# Altium PCB ECG_NEMO_final_V1B_main_stack2.PcbDoc
Units mm, origin at the board's own origin, x right, y up, seen from the top; angles counter-clockwise.
Board outline 54.01 x 36.22 mm, 4 copper layers (Top Layer, Signal Layer 1, Signal Layer 2, Bottom Layer), stack 0.778 mm thick; 61 components, 44 nets, 223 pads, 101 vias.
Unrouted connection lines stored in the file: 72.
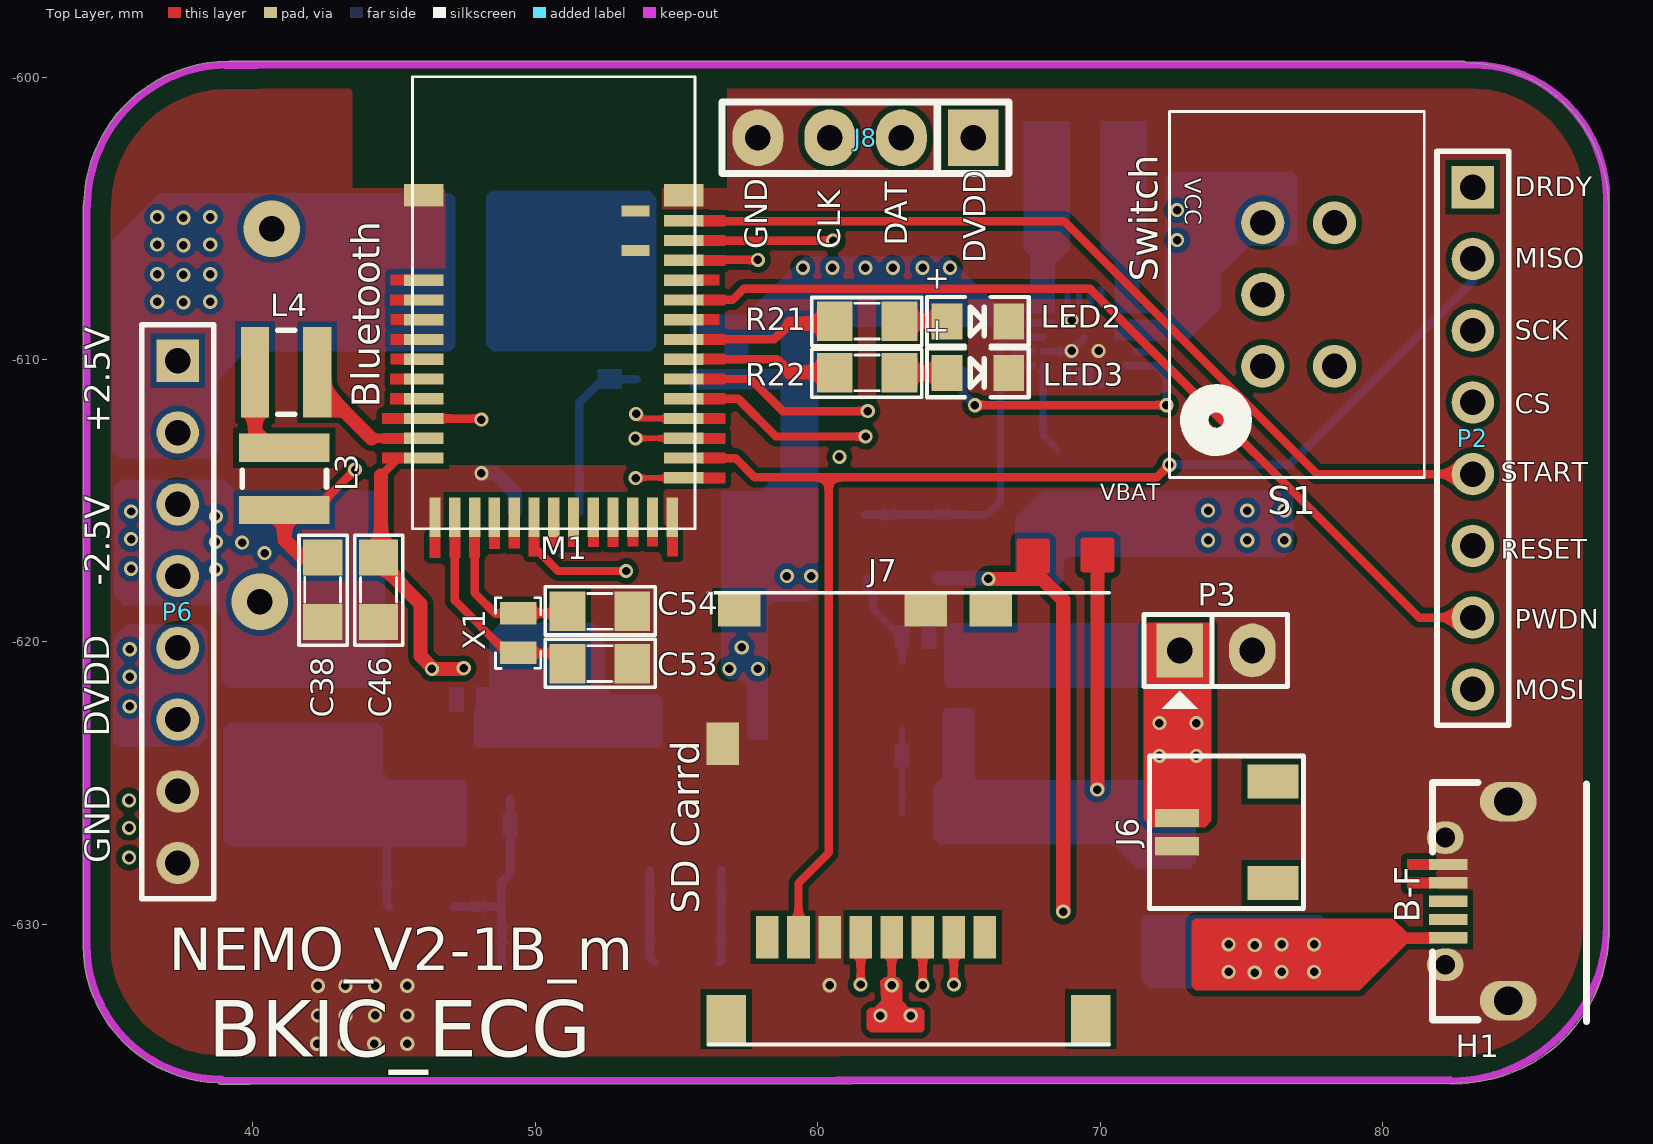
[diagram p0: Top Layer view]
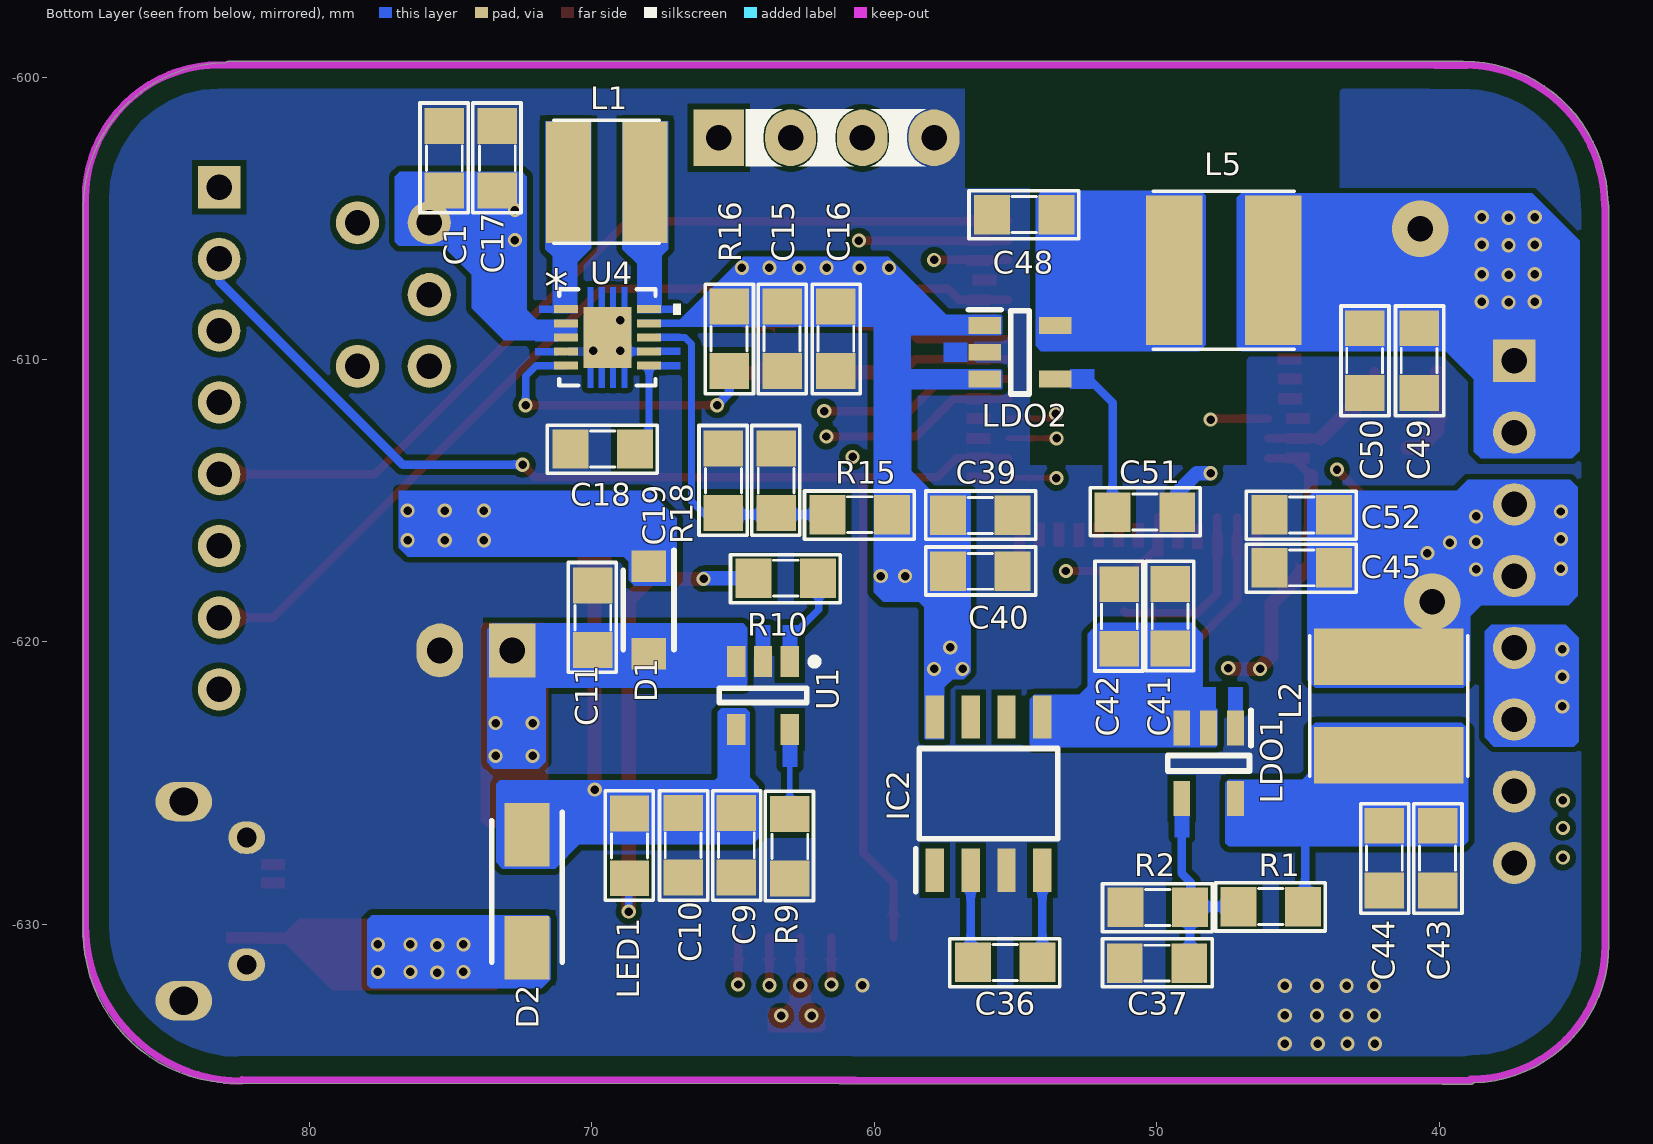
[diagram p1: Bottom Layer view, seen from below]
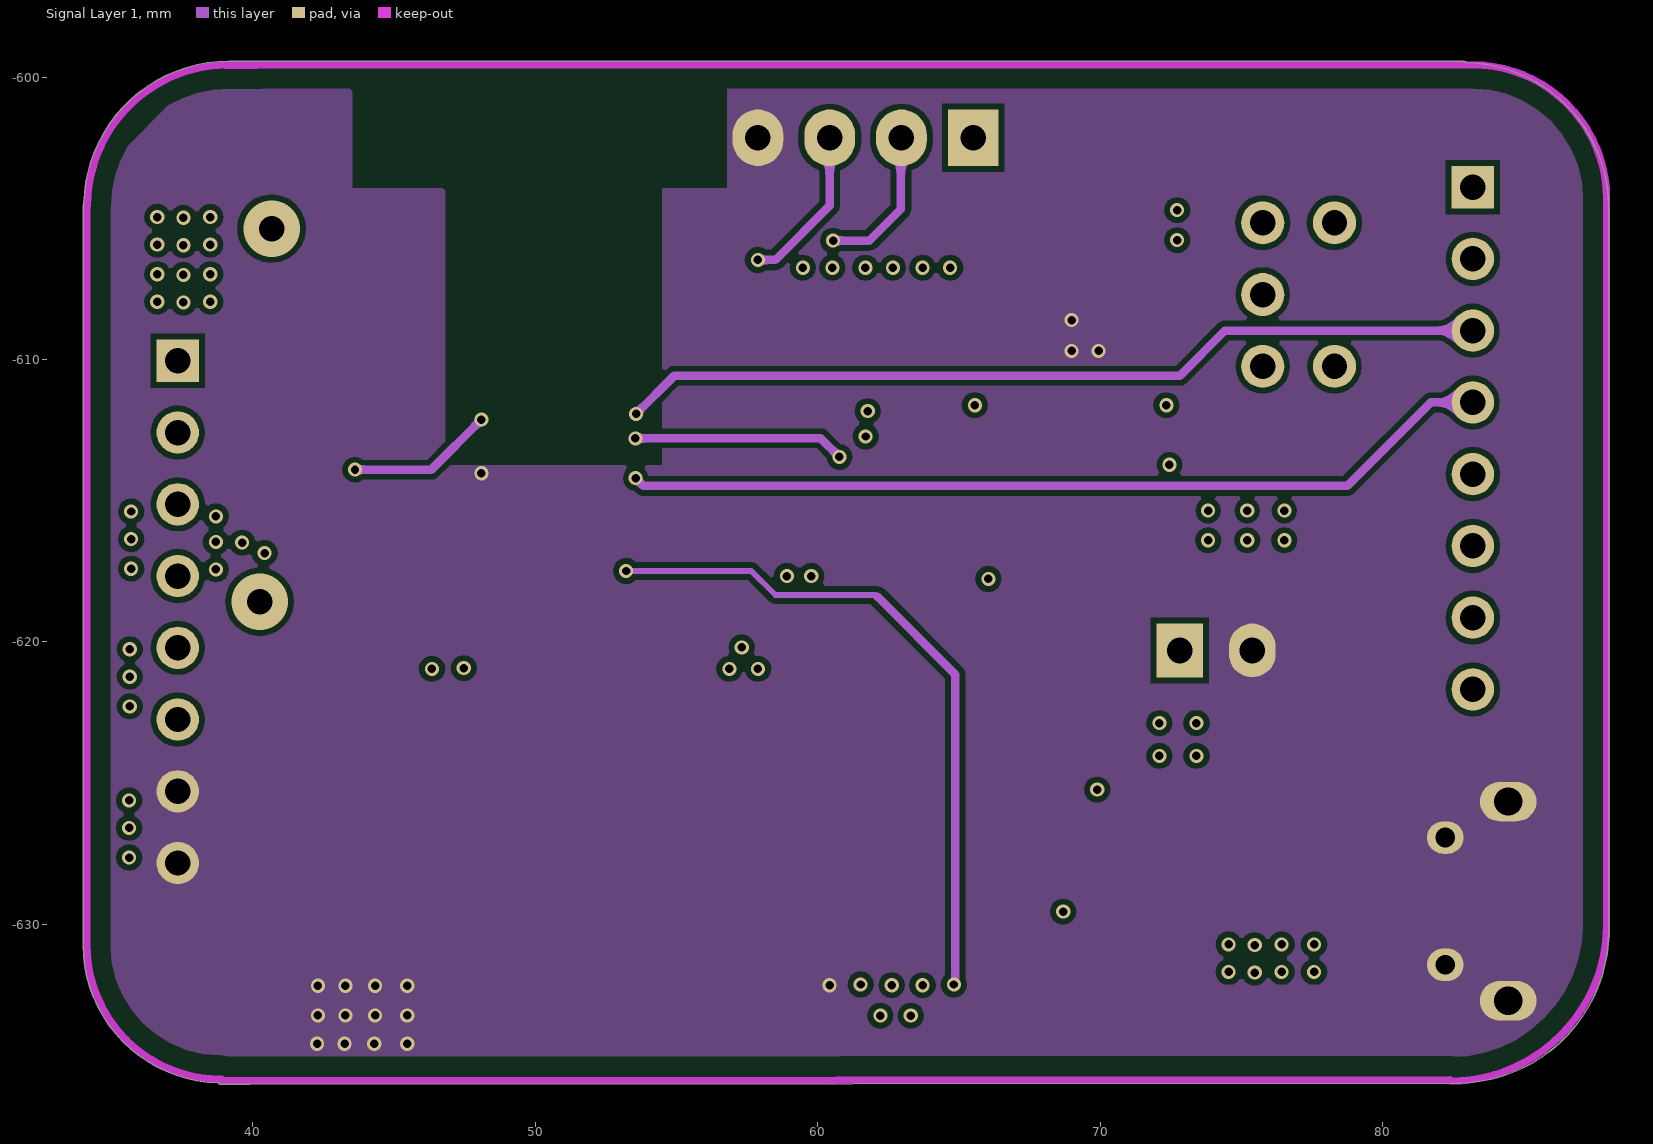
[diagram p2: Signal Layer 1]
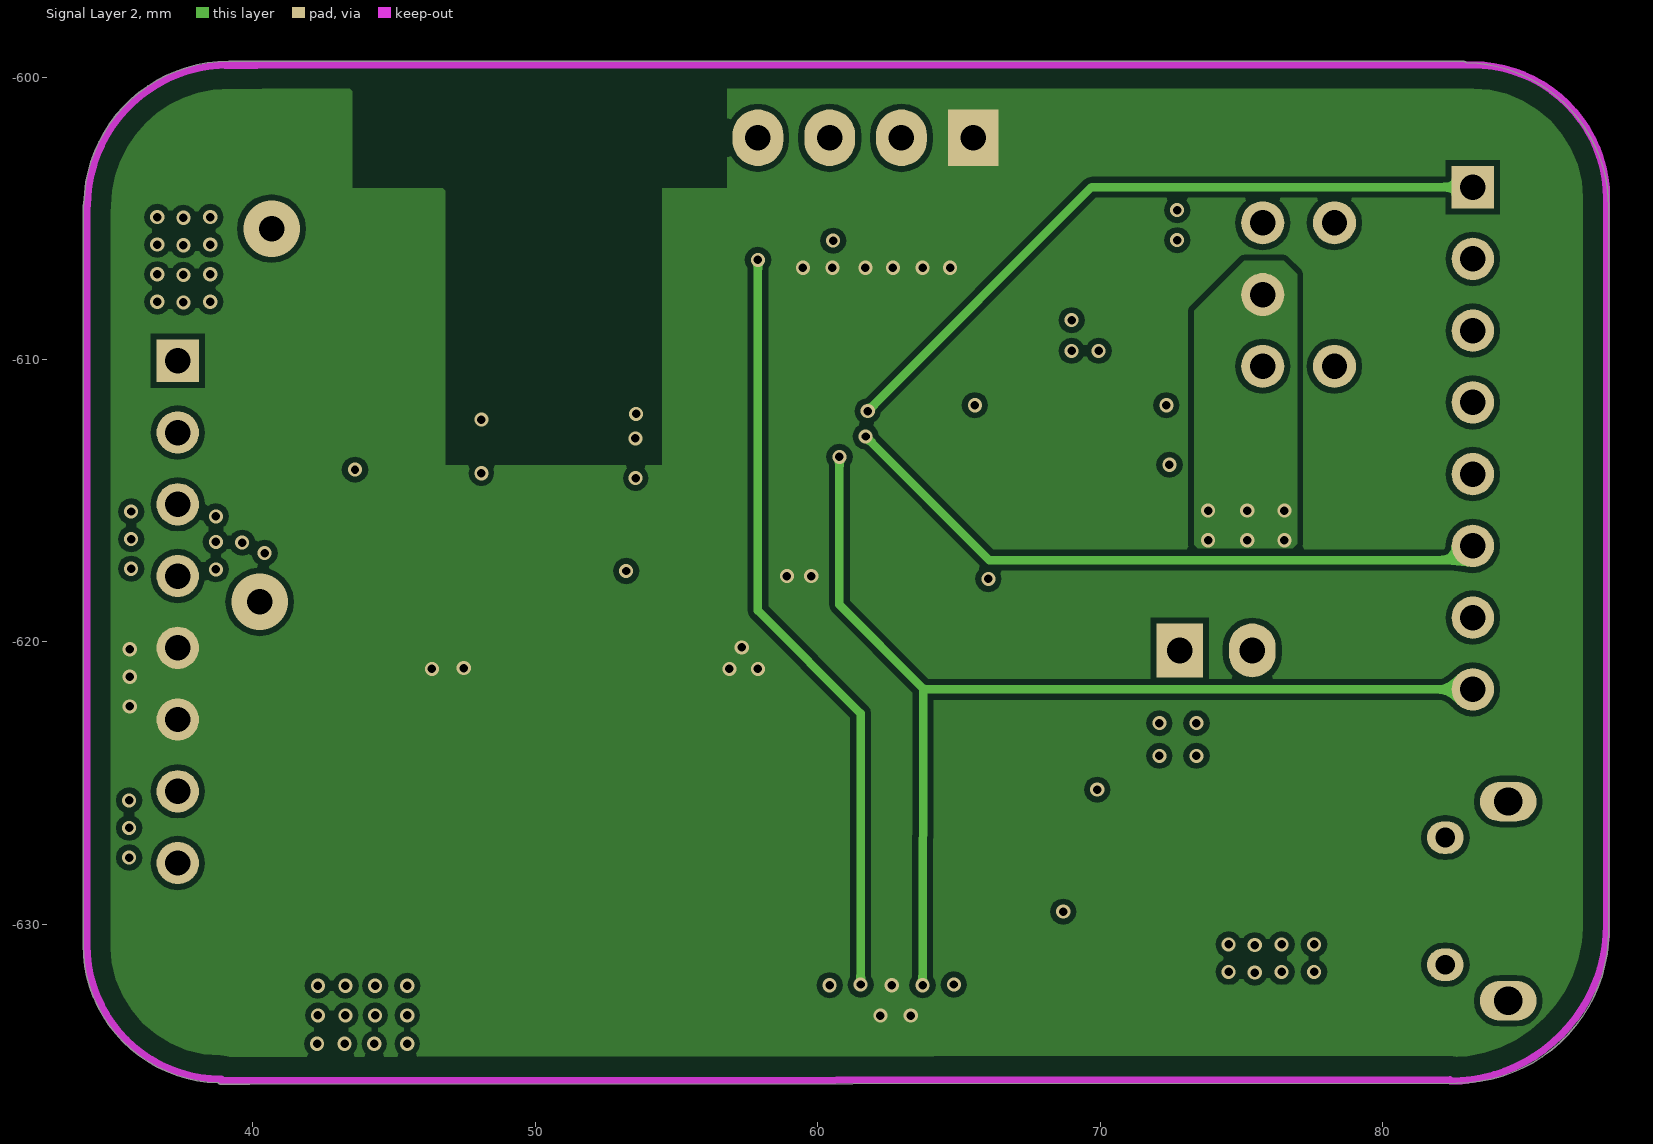
[diagram p3: Signal Layer 2]
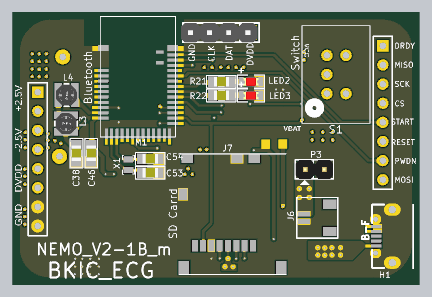
[diagram p4: 3D render of the assembled board from above, using the file's embedded part models]
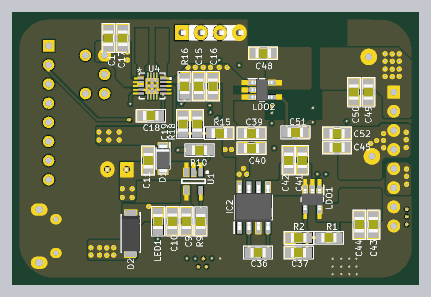
[diagram p5: 3D render of the assembled board from below, using the file's embedded part models]

## Layer stack, top to bottom
Top Solder: solder mask 0.0102, Solder Resist, Dk 3.5
Top Layer: signal copper 0.0356
Dielectric 1: core 0.254, FR-4, Dk 4.2
Signal Layer 1: signal copper 0.036
Dielectric 3: prepreg 0.127, Dk 4.2
Signal Layer 2: signal copper 0.036
Dielectric 2: core 0.254, Dk 4.2
Bottom Layer: signal copper 0.0356
Solder Side: solder mask 0.0102, Solder Resist, Dk 3.5

## Board outline
34.004,-630.721 ccw(c38.887,-630.721) 38.782,-635.603 ccw(c38.887,-635.531) 38.887,-635.659 ccw(c38.887,-635.531) 38.888,-635.659 39.869,-635.659 ccw(c39.869,-635.531) 39.884,-635.658 82.625,-635.621 ccw(c82.625,-635.494) 82.646,-635.62 ccw(c82.62,-630.23) 88.01,-630.23 88.01,-604.624 ccw(c82.882,-604.624) 82.982,-599.497 ccw(c82.882,-599.576) 82.882,-599.449 56.154,-599.441 cw(c56.152,-599.568) 56.154,-599.441 cw(c56.154,-599.568) 56.154,-599.441 ccw(c56.152,-599.568) 56.152,-599.441 39.181,-599.441 ccw(c39.181,-599.568) 39.171,-599.441 ccw(c39.157,-599.568) 39.157,-599.44 ccw(c39.157,-604.568) 34.03,-604.491 ccw(c34.131,-604.568) 34.004,-604.568 34.004,-630.721 ccw(c34.131,-630.721)

## Design rules (kind name [scope] priority, off if disabled: settings)
Clearance Clearance_5mils [TouchesRoom('Driver') and OnTopLayer] p1: gap=0.127 ignorepadtopadclearanceinfootprint=TRUE
Clearance Clearance_5.7mils [TouchesRoom('FETs')] p2: gap=0.145 ignorepadtopadclearanceinfootprint=FALSE
Clearance Clearance_keepout [OnLayer('Keep-Out Layer')] p3: gap=0.711 ignorepadtopadclearanceinfootprint=FALSE
Clearance [All] p4: gap=0.203 ignorepadtopadclearanceinfootprint=FALSE
ComponentClearance [All] p1: gap=0.3 collisioncheckmode=3 verticalgap=0.3 showdistances=TRUE
HoleSize [All] p1: absolutevalues=TRUE maxlimit=10 minlimit=0.025 maxpercent=80.000 minpercent=20.000
HoleToHoleClearance [All] p1: gap=0.241 allowstackedmicrovias=TRUE
MinimumSolderMaskSliver [All] p1 off: minsoldermaskwidth=0.254
PlaneConnect [All] p1: planeconnectstyle=Direct reliefexpansion=0.508 reliefentries=4 reliefconductorwidth=0.254 reliefairgap=0.254
PolygonConnect [All] p1: connectstyle=Direct reliefconductorwidth=0.254 reliefentries=4 polygonreliefangle="90 Angle" airgapwidth=0.254
RoutingVias [All] p1: holewidth=0.3 width=0.5 viastyle="Through Hole" minholewidth=0.178 minwidth=0.351 maxholewidth=0.508 maxwidth=0.762
SilkToSilkClearance [All] p1 off: silktosilkclearance=0.254
SilkToSolderMaskClearance [IsPad] p1 off: minsilkscreentomaskgap=0.254 clearancetoexposedcopper=TRUE
SolderMaskExpansion [All] p1: expansion=0.102 istentingtop=FALSE
UnRoutedNet [All] p1: checkbadconnections=TRUE
UnpouredPolygon [All] p1 off:
Width [All] p1: maxlimit=3 minlimit=0.2 preferedwidth=0.3
21 further rules are at their usual default settings.

## Components (designator, comment, footprint, x,y, rotation, side; value= is the part's Value field where it differs from the comment)
C1 "1uF" SM-0805 75.225,-602.875 r270 bottom value=103
C9 "47uF" SM-0805 64.889,-627.193 r90 bottom value=103
C10 "4uF/10V" SM-0805 66.771,-627.194 r90 bottom value=103
C11 "4uF/10V" SM-0805 69.971,-619.143 r270 bottom value=103
C15 "22uF" SM-0805 63.271,-609.261 r90 bottom value=103
C16 "22uF" SM-0805 61.367,-609.261 r90 bottom value=103
C17 "10uF" SM-0805 73.35,-602.875 r270 bottom value=103
C18 "0.1uF" SM-0805 69.621,-613.168 r180 bottom value=103
C19 "10pF" SM-0805 65.346,-614.293 r270 bottom value=103
C36 "1uF" SM-0805 55.371,-631.345 r180 bottom value=103
C37 "0.01uF" SM-0805 49.997,-631.37 r0 bottom value=103
C38 "1uF" SM-0805 42.482,-618.155 r90 top value=103
C39 "10uF" SM-0805 56.252,-615.518 r0 bottom value=103
C40 "1uF" SM-0805 56.252,-617.499 r0 bottom value=103
C41 "10uF" SM-0805 49.531,-619.093 r270 bottom value=103
C42 "2.2uF" SM-0805 51.33,-619.098 r270 bottom value=103
C43 "2.2uF" SM-0805 40.063,-627.65 r90 bottom value=103
C44 "1uF" SM-0805 41.95,-627.65 r90 bottom value=103
C45 "10uF" SM-0805 44.875,-617.375 r180 bottom value=103
C46 "10uF" SM-0805 44.457,-618.155 r90 top value=103
C48 "1uF" SM-0805 54.696,-604.868 r180 bottom value=103
C49 "10uF" SM-0805 40.716,-610.036 r90 bottom value=103
C50 "0.1uF" SM-0805 42.646,-610.036 r90 bottom value=103
C51 "1uF" SM-0805 50.425,-615.4 r0 bottom value=103
C52 "1uF" SM-0805 44.875,-615.5 r180 bottom value=103
C53 "12pF" SM-0805 52.296,-620.769 r180 top value=103
C54 "12pF" SM-0805 52.296,-618.914 r180 top value=103
D1 "SS34FA" SODFL3618X143N 67.996,-618.868 r270 bottom
D2 "N4007" DIOM5025X220N 72.296,-628.831 r270 bottom
H1 "USB B Micro/Mini" "USB-B-MICRO-female Tai02" 84.925,-629.475 r270 top
IC2 "LM2660MX_NOPB" SOIC127P600X175-8N 55.96,-625.368 r90 bottom
J6 "Jumper 2" "J2_Jst SH_1mm" 72.729,-627.233 r90 top value="JP 2"
J7 "502570-0893" MOLEX_502570-0893 63.225,-626.25 r180 top
J8 "Loading" SIP4 61.7,-602.15 r180 top value="Connector 4x2"
L1 "1.5uH, 1.75A" WE-TPC_381692 -1200.521,666.296 r180 bottom
L2 "3.3 uH, 1.95A" WE-TPC_4818/482892 1311.796,647.732 r90 bottom
L3 "10 uH, 1 A" WE-TPC_2828 41.125,-614.225 r0 top
L4 "15 uH, 0.72 A" WE-TPC_2828 41.189,-610.45 r270 top
L5 "3.3 uH, 1.95A" WE-TPC_4818/482892 -1222.364,663.157 r180 bottom
LDO1 "TPS72301DDCT" SOT95P280X110-5N 48.171,-624.293 r270 bottom
LDO2 "LDK130M25R" SOT95P280X145-5N 54.846,-609.743 r180 bottom
LED1 "LED" SM-0805 68.671,-627.219 r270 bottom value="LED 3 ly Single Colour"
LED2 "LED" led0805 65.675,-608.65 r0 top value="LED 3 ly Single Colour"
LED3 "LED" led0805 65.675,-610.471 r0 top value="LED 3 ly Single Colour"
M1 "MODULE_MDBT42Q" PCB_MDBT42Q_10X16 50.659,-599.99 r0 top
P2 "TOP Header 1" HDR1X8 83.196,-603.898 r270 top
P3 "Header 2" JP2 72.825,-620.298 r0 top
P6 "TOP Header 3" HDR1X8 37.35,-610.045 r270 top
R1 "100k" SM-0805 45.971,-629.368 r180 bottom value="R1/4W - 1K"
R2 "100k" SM-0805 49.971,-629.395 r180 bottom value="R1/4W - 1K"
R9 "2k" SM-0805 62.996,-627.236 r270 bottom value="R1/4W - 1K"
R10 "470" SM-0805 63.14,-617.743 r180 bottom value="R1/4W - 1K"
R15 "666k" SM-0805 60.521,-615.493 r180 bottom value="R1/4W - 1K"
R16 "1M" SM-0805 65.146,-609.261 r90 bottom value="R1/4W - 1K"
R18 "111k" SM-0805 63.478,-614.293 r270 bottom value="R1/4W - 1K"
R21 "1k" SM-0805 61.753,-608.642 r0 top value="R1/4W - 1K"
R22 "1k" SM-0805 61.753,-610.471 r0 top value="R1/4W - 1K"
S1 "Switch" SS12SDP2LC 75.76,-610.24 r90 top
U1 "MCP73832T-2ACI/OT" SOT-23-OT5_N 63.946,-621.893 r270 bottom
U4 "Part Number: TPS63060DSCR" DSC10_1P70X2P15 69.451,-609.218 r180 bottom value=Value
X1 "32.768kHz" "Crystal 32.768kHz SMD" 49.399,-618.885 r270 top value=4Mhz

## Footprints (in the part's own frame and the unit in brackets; to place one, negate y for a bottom-side part, rotate by r counter-clockwise, add the part's x,y. Pads: shape width x height; smd on the part's side, far side on the other; paste and mask are expansions set on the pad)
"Crystal 32.768kHz SMD" [mm]
  rect 0.8x1.3 smd: 1(0.1,0) 2(1.5,0)
  silkscreen extent -0.45,-0.8 2.05,0.8
DIOM5025X220N [mm]
  rect 2.25x1.6 smd: 1(-2,0) 2(2,0)
  silkscreen extent -2.8,-1.25 2.5,1.25, body extent -2.5,-1.25 2.5,1.25, height 2.2
DSC10_1P70X2P15 [mm]
  rect 0.85x0.28 smd: 1(-1.475,1) 2(-1.475,0.5) 3(-1.475,0) 4(-1.475,-0.5) 5(-1.475,-1) 6(1.475,-1) 7(1.475,-0.5) 8(1.475,0) 9(1.475,0.5) 10(1.475,1)
  rect 1.7x2.15 smd paste-1.062 mask-1.067: 11(0,0)
  Top Layer region: 0.5,-1.775 0.5,-1.075 0.7,-1.075 0.7,-1.775
  Top Layer region: -0.5,-1.775 -0.5,-1.075 -0.7,-1.075 -0.7,-1.775
  Top Layer region: 0.1,-1.775 0.1,-1.075 0.3,-1.075 0.3,-1.775
  Top Layer region: -0.1,-1.775 -0.1,-1.075 -0.3,-1.075 -0.3,-1.775
  Top Layer region: 0.5,1.775 0.5,1.075 0.7,1.075 0.7,1.775
  Top Layer region: -0.5,1.775 -0.5,1.075 -0.7,1.075 -0.7,1.775
  Top Layer region: 0.1,1.775 0.1,1.075 0.3,1.075 0.3,1.775
  Top Layer region: -0.1,1.775 -0.1,1.075 -0.3,1.075 -0.3,1.775
  silkscreen extent -1.7,-1.7 2.59,1.7, body extent 0,0 0.25,0.25, height 0.25
HDR1X8 [mm] "Connector; Header; 8 Position"
  rect 1.5x1.5 hole 0.9: 1(0,0)
  round 1.5 hole 0.9: 2(2.54,0) 3(5.08,0) 4(7.62,0) 5(10.16,0) 6(12.7,0) 7(15.24,0) 8(17.78,0)
  silkscreen extent -1.27,-1.27 19.05,1.27
"J2_Jst SH_1mm" [mm] "Jum select vdd or gnd"
  rect 1.2x1.8 smd: 0(-1.3,-3.4) 0(2.3,-3.4)
  rect 0.65x1.55 smd: 1(0,0) 2(1,0)
  silkscreen extent -2.2,-4.47 3.2,0.97
JP2 [mil]
  rect 65x75 hole 36: 1(0,0)
  oval 65x75 hole 36: 2(101,0)
  silkscreen extent -50,-81 150,50, body extent -48,-50 148,48, height 323
led0805 [mil]
  rect 43x50 smd: A(-43,0) K(43,0)
  silkscreen extent -71,-34 71,34, body extent -40,-26 40,24, height 43
MOLEX_502570-0893 [mm]
  rect 0.8x1.5 smd: 1(-2.7,4.2) 2(-1.6,4.2) 3(-0.5,4.2) 4(0.6,4.2) 5(1.7,4.2) 6(2.8,4.2) 7(3.9,4.2) 8(5,4.2)
  rect 1.15x1.5 smd: DL(6.575,-2.65)
  rect 1.5x1.15 smd: DS(-0.6,-7.375) SM3(-2.9,-7.375) SM4(6,-7.375)
  rect 1.4x1.7 smd: SM1(-6.45,7.1) SM2(6.45,7.1)
  silkscreen extent -7.1,-8 7.1,8
PCB_MDBT42Q_10X16 [mm]
  rect 1.4x0.8 smd mask+0: 1(-4.6,-4.2) 39(4.6,-4.2)
  rect 1.4x0.4 smd mask+0: 2(-4.6,-7.2) 3(-4.6,-7.9) 5(-4.6,-9.3) 6(-4.6,-10) 7(-4.6,-10.7) 8(-4.6,-11.4) 9(-4.6,-12.1) 10(-4.6,-12.8) 11(-4.6,-13.5) 25(4.6,-14.2) 26(4.6,-13.5) 27(4.6,-12.8) 28(4.6,-12.1) 29(4.6,-11.4) 30(4.6,-10.7) 31(4.6,-10) 32(4.6,-9.3) 33(4.6,-8.6) 34(4.6,-7.9) 35(4.6,-7.2) 36(4.6,-6.5) 37(4.6,-5.8) 38(4.6,-5.1)
  rect 1.4x0.4 smd: 4(-4.6,-8.6)
  rect 0.4x1.4 smd mask+0: 12(-4.2,-15.6) 13(-3.5,-15.6) 14(-2.8,-15.6) 15(-2.1,-15.6) 16(-1.4,-15.6) 17(-0.7,-15.6) 18(0,-15.6) 19(0.7,-15.6) 20(1.4,-15.6) 21(2.1,-15.6) 22(2.8,-15.6) 23(3.5,-15.6) 24(4.2,-15.6)
  rect 1x0.4 smd mask+0: 40(2.9,-4.75) 41(2.9,-6.15)
  silkscreen extent -5,-16 5,0
SIP4 [mm]
  rect 1.8x2 hole 0.9: 1(-3.81,0)
  oval 1.8x2 hole 0.9: 2(-1.27,0) 3(1.27,0) 4(3.81,0)
  silkscreen extent -5.08,-1.27 5.08,1.27, body extent -4.83,-1.27 5.33,1.27, height 8.54
SM-0805 [mil] "Compoment SMD 80x50mil"
  rect 50x55 smd: 1(-45,0) 2(45,0)
  silkscreen extent -77,-34 76,33, body extent -40,-27 40,23, height 24
SODFL3618X143N [mm]
  rect 1.12x1.22 smd: 1(-1.55,0) 2(1.55,0)
  silkscreen extent -2.11,-0.9 1.4,0.9, body extent -1.8,-0.9 1.8,0.9, height 1.43
SOIC127P600X175-8N [mm]
  rect 1.528x0.65 smd: 1(-2.711,1.905) 2(-2.711,0.635) 3(-2.711,-0.635) 4(-2.711,-1.905) 5(2.711,-1.905) 6(2.711,-0.635) 7(2.711,0.635) 8(2.711,1.905)
  silkscreen extent -3.47,-2.45 1.6,2.58, body extent -3.01,-2.45 3.01,2.45, height 1.63
SOT95P280X110-5N [mm]
  rect 1.25x0.6 smd: 1(-1.25,0.95) 2(-1.25,0) 3(-1.25,-0.95) 4(1.25,-0.95) 5(1.25,0.95)
  silkscreen extent -1.88,-1.45 0.28,1.5, body extent -1.4,-1.45 1.4,1.45, height 0.97
SOT95P280X145-5N [mm]
  rect 1.15x0.6 smd: 1(-1.25,0.95) 2(-1.25,0) 3(-1.25,-0.95) 4(1.25,-0.95) 5(1.25,0.95)
  silkscreen extent -1.83,-1.48 0.33,1.5, body extent -1.4,-1.48 1.4,1.47, height 1.45
SOT-23-OT5_N [mm]
  rect 1.1x0.65 smd: 1(-1.2,0.95) 2(-1.2,0) 3(-1.2,-0.95) 4(1.2,-0.95) 5(1.2,0.95)
  silkscreen extent -1.32,-1.55 0.25,1.95, body extent -0.9,-1.55 0.9,1.55, height 1.45
SS12SDP2LC [mil] "Switch"
  round 60 hole 35.43: 1(0,0) 2(100,0) 3(200,0) L+(0,-100) L-(200,-100)
  silkscreen extent -155,-225 355,130
"USB-B-MICRO-female Tai02" [mm]
  rect 0.4x1.35 smd: 1(1,-2.6) 2(0.35,-2.6) 3(-0.3,-2.6) 4(-0.95,-2.6) 5(-1.6,-2.6)
  oval 1.4x2 hole 1: 5(-3.825,-0.475) 5(3.225,-0.475)
  oval 1.15x1.3 hole 0.7: 5(-2.55,-2.7) 5(1.95,-2.7)
  silkscreen extent -4.5,-3.15 3.95,2.3
WE-TPC_2828 [mm]
  rect 3.2x1 smd: 1(0,1.1) 2(0,-1.1)
  silkscreen extent -1.49,-0.3 1.49,0.3, body extent -1.4,-1.4 1.4,1.4, height 2.82
WE-TPC_4818/482892 [mm]
  rect 2x5.3 smd: 1(-1271.75,-1270) 2(-1268.25,-1270)
  silkscreen extent -1272.49,-1272.8 -1267.51,-1267.2
WE-TPC_381692 [mm]
  rect 1.6x4.3 smd: 1(-1271.356,-1270.014) 2(-1268.644,-1270.014)
  silkscreen extent -1271.87,-1272.18 -1268.13,-1267.82

## Part data
C1 C9 C10 C11 C15 C16 C17 C18 C19 C36 C37 C38 C39 C40 C41 C42 C43 C44 C45 C46 C48 C49 C50 C51 C52 C53 C54: library part CM, "Cap SMD"
D1: "Schottky Diode", Manufacturer_Name="ON Semiconductor", Mouser Part Number=512-SS34FA, Datasheet Link=https://componentsearchengine.com/Datasheets/1/SS34FA.pdf, Height=1.43mm, Manufacturer_Part_Number=SS34FA, Mouser Price/Stock=https://www.mouser.com/Search/Refine.aspx?Keyword=512-SS34FA
D2: library part EC11FS2, "Diode", Manufacturer_Name=KYOCERA, Mouser Part Number=346-EC11FS2, Datasheet Link=https://www.mouser.jp/datasheet/2/909/EC11FS2-file-1588983.pdf, Height=2.2mm, Manufacturer_Part_Number=EC11FS2
H1: library part "USB B Female Micro/Mini SMD", "USB B Female Micro/Mini SMD"
IC2: "Integrated Circuit", Arrow Part Number="LM2660MX NOPB", Manufacturer_Name="Texas Instruments", Arrow Price/Stock=https://www.arrow.com/en/products/lm2660mxnopb/texas-instruments, Datasheet Link=https://www.ti.com/lit/ds/symlink/lm2660.pdf?ts=1636191506646&ref_url=https%253A%252F%252Fwww.ti.com%252Fstore%252Fti%252Fen%252Fp%252Fproduct%252F%253Fp%253DLM2660MX%252FNOPB, Height=1.75mm, Manufacturer_Part_Number="LM2660MX NOPB"
J6: library part "JP 2"
J7: "10 _8 + 2_ Position Card Connector Secure Digital - microSDâ„¢ Surface Mount, Right Angle Gold", Package=None, Availability=Unavailable, MF=Molex, MP=502570-0893, Price=None, SnapEDA_Link=https://www.snapeda.com/parts/502570-0893/Molex/view-part/225170/?ref=snap
J8: library part JP4, "Connector 4"
L1: library part 744031001, "Inductor", Manufacturer_Name="Wurth Elektronik", Mouser Part Number=710-744031001, Manufacturer_Part_Number=744031001, Mouser Price/Stock=https://www.mouser.co.uk/ProductDetail/Wurth-Elektronik/744031001?qs=PGXP4M47uW5omdHfp5PCig%3D%3D
L2 L5: library part 744042003, "Inductor", Manufacturer_Name="Wurth Elektronik", Mouser Part Number=710-744042003, Manufacturer_Part_Number=744042003, Mouser Price/Stock=https://www.mouser.co.uk/ProductDetail/Wurth-Elektronik/744042003?qs=PGXP4M47uW67fekbtUi6HQ%3D%3D
L3: library part 744025100, "SMT Shielded Tiny Power Inductor WE-TPC, size 2828, 10 uH, 1 A", DC Resistance max.="190 mOhm", Inductance="10 uH", Operating Temperature="-40 to +125 degC", Rated Current="1 A", Saturation Current="1.1 A", Self Resonant Frequency="41 MHz", ComponentLink1Description=Manufacturer, ComponentLink1URL=http://www.we-online.de, ComponentLink2Description=Datasheet, ComponentLink2URL=https://katalog.we-online.com/pbs/datasheet/744025100.pdf, Mounting Technology=SMT, Packaging="Tape and Reel", Part Number=744025100, Published Date="December 2018", Publisher="Wurth Elektronik", Size=2828
L4: library part 744025150, "SMT Shielded Tiny Power Inductor WE-TPC, size 2828, 15 uH, 0.72 A", DC Resistance max.="400 mOhm", Inductance="15 uH", Operating Temperature="-40 to +125 degC", Rated Current="0.72 A", Saturation Current="0.9 A", Self Resonant Frequency="32 MHz", ComponentLink1Description=Manufacturer, ComponentLink1URL=http://www.we-online.de, ComponentLink2Description=Datasheet, ComponentLink2URL=https://katalog.we-online.com/pbs/datasheet/744025150.pdf, Mounting Technology=SMT, Packaging="Tape and Reel", Part Number=744025150, Published Date="December 2018", Publisher="Wurth Elektronik", Size=2828
LDO1: "Integrated Circuit", Manufacturer_Name="Texas Instruments", Mouser Part Number=595-TPS72301DDCT, Arrow Part Number=TPS72301DDCT, Arrow Price/Stock=https://www.arrow.com/en/products/tps72301ddct/texas-instruments?region=nac, Datasheet Link=http://www.ti.com/lit/gpn/TPS723, Height=1.1mm, Manufacturer_Part_Number=TPS72301DDCT, Mouser Price/Stock=https://www.mouser.co.uk/ProductDetail/Texas-Instruments/TPS72301DDCT?qs=7z%252BmIopC6%2FL7xVbTZrmV7g%3D%3D
LDO2: "Integrated Circuit", Manufacturer_Name=STMicroelectronics, Mouser Part Number=511-LDK130M25R, Arrow Part Number=LDK130M25R, Arrow Price/Stock=https://www.arrow.com/en/products/ldk130m25r/stmicroelectronics, Datasheet Link=http://www.st.com/web/en/resource/technical/document/datasheet/DM00076097.pdf, Height=1.45mm, Manufacturer_Part_Number=LDK130M25R, Mouser Price/Stock=https://www.mouser.com/Search/Refine.aspx?Keyword=511-LDK130M25R
LED1 LED2 LED3: "LED Single colour Green and Red"
M1: "MDBT42Q"
P2 P6: library part "Header 8", "Header, 8-Pin", LatestRevisionDate=17-Jul-2002, LatestRevisionNote="Re-released for DXP Platform.", Publisher="Altium Limited"
P3: "Header, 2-Pin", LatestRevisionDate=17-Jul-2002, LatestRevisionNote="Re-released for DXP Platform.", Publisher="Altium Limited"
R1 R2 R9 R10 R15 R16 R18 R21 R22: library part R, "Resistor 1/4W"
S1: library part SS12SDP2LC
U1: "Miniature Single-Cell, Fully Integrated Li-Ion, Li-Polymer Charge Management Controller, 4.2V, 5-Pin SOT-23, Industrial Temperature, Tape and Reel", Supplier Part Number 1=MCP73832T-2ACI/OTTR-ND, Code_IPC=SOT23-5, ComponentLink1Description=Datasheet, ComponentLink1URL=http://ww1.microchip.com/downloads/en/DeviceDoc/21984e.pdf, ComponentLink2Description="Packaging Specification", ComponentLink2URL=http://www.microchip.com/stellent/groups/techpub_sg/documents/packagingspec/en012702.pdf, ComponentLink3Description="Microchip.com Home", ComponentLink3URL=http://www.microchip.com/, DatasheetVersion="revE, Sep-2008", LatestRevisionDate=27-Nov-2009, LatestRevisionNote="Updated to datasheet revision E, Sep-2008", PackageDescription="5-Lead Plastic Small Outline Transistor (OT) [SOT-23]", PackageReference=SOT-23-OT5, PackageVersion="revBB, Aug-2009", Published=29-Jan-2009, Publisher="Altium Limited", Supplier 1=Digi-Key, Supplier 2=Digi-Key, Supplier 3=Digi-Key, Supplier 4=Farnell, Supplier Part Number 2=MCP73832T-2ACI/OTCT-ND, Supplier Part Number 3=MCP73832T-2ACI/OTDKR-ND, Supplier Part Number 4=1332159
U4: library part TPS63060DSCR, "No Description Available", Manufacturer="Texas Instruments", Built_By=EMA_UL_Team, Copyright="Copyright (C) 2018 Accelerated Designs. All rights reserved", Manufacturer_Part_Number=TPS63060DSCR, RefDes=RefDes, Type=DEV, Vendor="Texas Instruments"
X1: library part Crystal, "Crystal For all Crystal 2pin."

## Via types
v1: diameter 0.5, hole 0.3, Top Layer to Bottom Layer, 63 vias
v2: diameter 0.5, hole 0.3, Top Layer to Bottom Layer, tented both sides, 36 vias
v3: diameter 2, hole 0.9, Top Layer to Bottom Layer, 2 vias

## Nets (pads, with @x,y where several pads share a name; then routed paths per layer and width w, separated by ;. In a path a pad name is that pad's centre, name@x,y a point inside that pad or via, vN(x,y) a via of type N, cw(c..) or ccw(c..) an arc to the next point about the centre after c; other vN are vias at no path point)
+2.5V: C49.2 C50.2 L5.2 P6.1 P6.2
  other v1: 37.551,-607.981 36.626,-607.956 38.501,-607.956 37.551,-607.006 36.626,-606.981 38.501,-606.981 37.551,-605.956 36.626,-605.931 38.501,-605.931 37.551,-604.981 36.626,-604.956 38.501,-604.956
  other v3: 40.671,-605.368
-2.5V: C45.2 C52.2 L2.2 P6.3 P6.4
  other v1: 38.701,-617.431 35.701,-617.406 40.425,-616.85 39.626,-616.481 38.701,-616.456 35.701,-616.356 38.701,-615.551 35.701,-615.381
  other v3: 40.25,-618.575
CS: M1.25 P2.4 | length 32.7
  Top Layer w0.2: v2(53.559,-614.2) 53.57,-614.19 M1.25
  Signal Layer 1 w0.3: v2(53.559,-614.2) 53.834,-614.475 78.75,-614.475 81.707,-611.518 P2.4
CS_1: J7.2 M1.17 | length 30.5
  Top Layer w0.3: M1.17 49.959,-616.634 50.812,-617.487 v2(53.225,-617.487) ; v2(64.825,-632.125) J7.2
  Signal Layer 1 w0.2: v2(53.225,-617.487) 57.655,-617.487 58.506,-618.337 62.062,-618.337 62.117,-618.392
  Signal Layer 1 w0.3: 62.117,-618.392 64.876,-621.151 v2@64.876,-632.15
DRDY: M1.30 P2.1 | length 31.7
  Top Layer w0.3: M1.30 57.632,-610.69 58.767,-611.825 v2(61.775,-611.825)
  Signal Layer 2 w0.3: v2(61.775,-611.825) 69.702,-603.898 P2.1
DVDD: C15.2 C16.2 C39.2 C40.2 C46.2 IC2.8 J7.4 J8.1 LDO2.1 LDO2.3 M1.11 P6.5 P6.6 R15.2 R16.2 U4.9 | length 12.2
  Top Layer w0.3: 44.55,-614.1 45.16,-613.49 M1.11 ; v1(62.625,-632.15) J7.4
  Top Layer w0.5: 44.55,-614.1 44.55,-617.25 45.95,-618.65 45.95,-620.5 46.375,-620.925 v2(46.35,-620.95) 47.45,-620.95 v2(47.475,-620.925)
  other v1: 62.225,-633.225 63.3,-633.225 35.651,-622.281 35.651,-621.231 56.879,-620.95 57.89,-620.95 35.651,-620.256 57.315,-620.191 58.915,-617.665 59.775,-617.665 59.481,-606.75 60.525,-606.75 61.691,-606.75 62.666,-606.75 63.716,-606.75 64.691,-606.75
GND: C1.1 C9.1 C10.1 C11.1 C15.1 C16.1 C17.1 C18.1 C19.1 C37.2 C38.1 C39.1 C40.1 C41.1 C42.1 C43.1 C44.1 C45.1 C46.1 C48.1 C49.1 C50.1 C51.1 C52.1 C53.1 C54.1 H1.4 H1.5 IC2.3 J6.1 J7.6 J7.DL J7.DS J8.4 LDO1.1 LDO2.2 LED2.K LED3.K M1.1 M1.12 M1.24 M1.39 P3.2 P6.7 P6.8 R2.1 R9.2 R18.1 U1.2 U4.4 U4.7 U4.11 | length 3.8
  Bottom Layer w0.254: U4.7 68.951,-609.718 U4.11
  Bottom Layer w0.5: v2(48.1,-614.025) 48.589,-614.025 49.282,-614.718 C51.1
  other v2: 42.281,-634.224 43.256,-634.224 44.306,-634.224 45.474,-634.224 42.312,-633.219 43.287,-633.219 44.337,-633.219 45.474,-633.219 42.312,-632.169 43.287,-632.169 44.337,-632.169 45.474,-632.169 60.425,-632.15 68.996,-609.694 69.951,-609.694 68.996,-608.606
MISO: J7.7 M1.26 P2.2 | length 48.6
  Top Layer w0.3: M1.26 57.09,-613.49 57.775,-614.175 60.391,-614.175 ; J7.7 59.325,-628.533 60.391,-627.467 60.391,-614.175 ; v1(72.458,-613.725) 72.008,-614.175 60.391,-614.175
  Bottom Layer w0.3: v1(72.458,-613.725) 76.7,-613.725 83.196,-607.229 P2.2
MOSI: J7.3 M1.27 P2.8 | length 50.3
  Top Layer w0.2: v2(53.55,-612.79) M1.27
  Top Layer w0.3: v2(63.716,-632.15) 63.72,-632.145 63.72,-630.455 J7.3
  Signal Layer 1 w0.3: v2(53.55,-612.79) 60.115,-612.79 v2(60.775,-613.45)
  Signal Layer 2 w0.2: 63.737,-621.643 63.772,-621.678
  Signal Layer 2 w0.3: v2(60.775,-613.45) 60.775,-618.681 63.737,-621.643 v2(63.716,-632.15) ; 63.772,-621.678 P2.8
NetC9_2: C9.2 C10.2 D2.1 LED1.1 U1.4 | length 9.1
  Top Layer w0.2: v1(69.9,-625.225) v1@69.912,-625.213
  Top Layer w0.5: v1@69.912,-625.213 69.912,-616.925
  Bottom Layer w0.2: v1(69.9,-625.225) 70.7,-625.225 70.725,-625.25
NetC11_2: C11.2 D1.2 J6.2 P3.1 U1.3
  other v1: 72.1,-624.033 73.414,-624.033 72.1,-622.874 73.414,-622.87
NetC18_2: C18.2 U4.6 | length 3.2
  Bottom Layer w0.254: U4.6 67.976,-612.666 C18.2
NetC19_2: C19.2 R15.1 R18.2 U4.8 | length 12.2
  Bottom Layer w0.254: C19.2@65.289,-615.493 65.996,-615.493 66.475,-615.014 66.475,-609.45 66.707,-609.218 U4.8
  Bottom Layer w0.3: R15.1 C19.2@65.289,-615.493
NetC36_1: C36.1 IC2.2 | length 3.3
  Bottom Layer w0.3: C36.1 56.595,-631.264 IC2.2
NetC36_2: C36.2 IC2.4 | length 3.3
  Bottom Layer w0.3: IC2.4 54.055,-631.171 C36.2
NetC37_1: C37.1 LDO1.4 R1.1 R2.2 | length 7.7
  Bottom Layer w0.3: R1.1 R2.2@48.801,-629.368 ; C37.1 48.828,-631.345 R2.2 R2.2@48.801,-629.368 ; LDO1.4 49.121,-628.193 48.801,-628.513 R2.2@48.801,-629.368
NetC38_2: C38.2 L3.2 M1.9 | length 13.1
  Top Layer w0.3: L3.2 42.2,-615.325 v2(43.625,-613.9) ; M1.9 48.065,-612.09 v2(48.1,-612.125)
  Top Layer w0.5: L3.2 41.125,-616.381 41.755,-617.012 C38.2
  Signal Layer 1 w0.3: v2(43.625,-613.9) 46.325,-613.9 v2(48.1,-612.125) v2@48.125,-612.1
NetC41_2: C41.2 C42.2 IC2.5 LDO1.2 LDO1.3
NetC43_2: C43.2 C44.2 L2.1 LDO1.5 R1.2 | length 5.6
  Bottom Layer w0.3: C44.2 44.582,-626.507 44.75,-626.675 44.75,-629.29 R1.2
NetC48_2: C48.2 L5.1 LDO2.5
NetC51_2: C51.2 LDO2.4 | length 6.2
  Bottom Layer w0.3: C51.2 51.568,-611.525 52.4,-610.693 LDO2.4
NetC53_2: C53.2 M1.13 X1.2 | length 7.9
  Top Layer w0.3: M1.13 47.159,-618.534 49.01,-620.385 X1.2 50.769,-620.385 C53.2
NetC54_2: C54.2 M1.14 X1.1 | length 6.3
  Top Layer w0.3: M1.14 47.859,-618.265 48.579,-618.985 X1.1 51.083,-618.985 C54.2
NetD1_1: D1.1 S1.2
  other v1: 73.827,-616.4 75.211,-616.4 76.525,-616.4 73.827,-615.345 75.211,-615.345 76.526,-615.345
NetD2_2: D2.2 H1.1
  other v1: 75.476,-631.706 74.551,-631.681 76.426,-631.681 77.576,-631.681 75.476,-630.731 74.551,-630.706 76.426,-630.706 77.576,-630.706
NetL1_1: L1.1 U4.1
NetL1_2: L1.2 U4.10
NetL3_1: L3.1 L4.2 | length 3.4
  Top Layer w0.5: L4.2 40.089,-612.536 40.678,-613.125 L3.1
NetL4_1: L4.1 M1.10 | length 5
  Top Layer w0.3: 44.215,-612.79 M1.10
  Top Layer w0.381: L4.1@42.289,-610.864 L4.1
  Top Layer w0.5: L4.1@42.289,-610.864 44.215,-612.79
NetLED1_2: LED1.2 R10.1 | length 17.7
  Top Layer w0.5: v2(66.046,-617.768) 67.6,-617.768 ; 67.6,-616.971 67.6,-617.768 ; v2(68.696,-629.543) 68.696,-618.518 67.946,-617.768 67.6,-617.768
  Bottom Layer w0.254: LED1.2 68.696,-628.387 v2(68.696,-629.543)
  Bottom Layer w0.5: R10.1 66.021,-617.743 v2(66.046,-617.768)
NetLED2_A: LED2.A R21.2 | length 1.7
  Top Layer w0.3: LED2.A@64.575,-608.642 LED2.A
  Top Layer w0.5: R21.2 LED2.A@64.575,-608.642
NetLED3_A: LED3.A R22.2 | length 1.7
  Top Layer w0.5: R22.2 LED3.A
NetM1_31: M1.31 R22.1 | length 5.5
  Top Layer w0.3: M1.31 58.565,-609.99 59.025,-610.45 ; R22.1@60.589,-610.45 R22.1
  Top Layer w0.5: 59.025,-610.45 R22.1@60.589,-610.45
NetM1_32: M1.32 R21.1 | length 5.6
  Top Layer w0.3: M1.32 58.46,-609.29 59.025,-608.725 ; R21.1@60.527,-608.725 R21.1
  Top Layer w0.5: 59.025,-608.725 R21.1@60.527,-608.725
NetR9_1: R9.1 U1.5 | length 3
  Bottom Layer w0.2: R9.1 U1.5
NetR10_2: R10.2 U1.1 | length 3.5
  Bottom Layer w0.254: R10.2@61.753,-617.743 61.753,-618.15 61.971,-618.368 61.971,-618.853 62.996,-619.878 U1.1
NetR16_1: R16.1 U4.5 | length 10.8
  Top Layer w0.3: v2(65.571,-611.618) v2(72.346,-611.618)
  Bottom Layer w0.254: U4.5 71.986,-610.218 72.346,-610.579 v2(72.346,-611.618)
  Bottom Layer w0.3: R16.1 65.146,-611.193 v2(65.571,-611.618)
PWDN: M1.34 P2.7 | length 32.9
  Top Layer w0.3: M1.34 56.995,-607.89 57.384,-607.5 69.655,-607.5 81.293,-619.138 P2.7
RESET: M1.29 P2.6 | length 30.5
  Top Layer w0.3: M1.29 57.19,-611.39 58.525,-612.725 v2(61.7,-612.725)
  Signal Layer 2 w0.3: v2(61.7,-612.725) 66.075,-617.1 82.694,-617.1 P2.6
SCK: M1.28 P2.3 | length 32.7
  Top Layer w0.2: v1(53.575,-611.925) 53.55,-611.95 53.525,-611.95 53.665,-612.09 M1.28
  Signal Layer 1 w0.3: v1(53.575,-611.925) 54.925,-610.575 72.825,-610.575 74.422,-608.978 P2.3
START: M1.38 P2.5 | length 31.7
  Top Layer w0.3: M1.38 55.274,-605.075 55.299,-605.1 68.725,-605.1 77.683,-614.058 P2.5
SWD_CLK: J7.5 J8.3 M1.36 | length 37.2
  Top Layer w0.3: M1.36 55.274,-606.475 v2(57.89,-606.475) ; v2(61.525,-632.125) J7.5
  Signal Layer 1 w0.3: v2(57.89,-606.475) 58.506,-606.475 60.43,-604.551 J8.3
  Signal Layer 2 w0.3: v2(57.89,-606.475) 57.89,-618.89 61.525,-622.525 v2(61.525,-632.125)
SWDIO: J8.2 M1.37 | length 10.7
  Top Layer w0.3: M1.37 v2(60.55,-605.79)
  Signal Layer 1 w0.3: v2(60.55,-605.79) 61.835,-605.79 62.95,-604.675 62.95,-602.17 J8.2
VCC: C1.2 C17.2 S1.3 U4.2 U4.3 | length 1.1
  Bottom Layer w0.2: v1(72.729,-605.775) v1(72.729,-604.71)
pads on no net: H1.2 H1.3 IC2.1 IC2.6 IC2.7 J6.0 J7.1 J7.8 J7.SM1 J7.SM2 J7.SM3 J7.SM4 M1.2 M1.3 M1.4 M1.5 M1.6 M1.7 M1.8 M1.15 M1.16 M1.18 M1.19 M1.20 M1.21 M1.22 M1.23 M1.33 M1.35 M1.40 M1.41 S1.1 S1.L+ S1.L-
copper on no net: | length 0.3
  Top Layer w0.254: 16.129,-451.104 16.383,-451.104
  other v1: 35.626,-627.631 35.626,-626.581 35.626,-625.606

## Polygon pours and split planes (outlines as drawn)
DVDD on Signal Layer 2 "Signal Layer 2-DVDD" (solid, pour order 28): 34.15,-602.9 37.4,-599.65 84.45,-599.65 87.675,-602.875 87.675,-632.025 84.225,-635.475 37.6,-635.475 34.225,-632.1
NetD1_1 on Signal Layer 2 "Signal Layer 2-NetD1_1" (solid, pour order 42): 73.454,-616.675 76.825,-616.675 76.975,-616.525 76.975,-606.975 76.5,-606.5 75.1,-606.5 74.625,-606.975 73.33,-608.27 73.33,-616.55
GND on Signal Layer 1 "Top Layer-GND" (solid, pour order 34): 34.45,-603.575 37.9,-600.125 85.028,-600.125 87.55,-602.647 87.55,-632.325 84.45,-635.425 37.425,-635.425 34.45,-632.45
GND on Bottom Layer "Bottom Layer-GND" (solid, pour order 32): 34.375,-603.3 37.825,-599.85 84.753,-599.85 87.8,-602.897 87.8,-632.075 84.725,-635.15 37.35,-635.15 34.375,-632.175
GND on Top Layer "Top Layer-GND" (solid, pour order 30): 34.375,-603.3 37.825,-599.85 84.656,-599.85 87.55,-602.744 87.55,-632.05 84.45,-635.15 37.35,-635.15 34.375,-632.175

## Keep-outs
Keep-Out Layer:
  lines w0.254: 34.131,-604.568 34.131,-630.721 ccw(c38.887,-630.721) 38.887,-635.477 ; 34.157,-604.568 cw(c39.157,-604.568) 39.157,-599.568 ; 39.03,-599.593 40.149,-599.593 ; 39.181,-599.568 83.191,-599.568 cw(c83.191,-604.311) 87.934,-604.311 ; 39.869,-635.531 38.887,-635.531 82.395,-635.494 ; 82.39,-635.545 ccw(c82.39,-630.002) 87.932,-630.002 87.932,-604.296

## Other copper
Top Layer:
  region: 54.35,-615.779 54.35,-616.617 53.975,-616.617 53.975,-615.779
  region: 53.65,-615.779 53.65,-616.617 53.275,-616.617 53.275,-615.779
  region: 52.95,-615.797 52.95,-616.635 52.575,-616.635 52.575,-615.797
  region: 52.25,-615.797 52.25,-616.635 51.875,-616.635 51.875,-615.797
  region: 51.55,-615.797 51.55,-616.635 51.175,-616.635 51.175,-615.797
  region: 50.85,-615.804 50.85,-616.642 50.475,-616.642 50.475,-615.804
  region: 49.45,-615.85 49.45,-616.689 49.075,-616.689 49.075,-615.85
  region: 48.75,-615.854 48.75,-616.692 48.375,-616.692 48.375,-615.854
  region: 56.521,-608.775 55.683,-608.775 55.683,-608.4 56.521,-608.4
  region: 56.521,-607.375 55.683,-607.375 55.683,-607 56.521,-607
  region: 45.721,-607.375 44.883,-607.375 44.883,-607 45.721,-607
  region: 45.709,-608.075 44.871,-608.075 44.871,-607.7 45.709,-607.7
  region: 45.721,-608.775 44.883,-608.775 44.883,-608.4 45.721,-608.4
  region: 45.721,-609.476 44.883,-609.476 44.883,-609.101 45.721,-609.101
  region: 45.721,-610.175 44.883,-610.175 44.883,-609.8 45.721,-609.8
  region: 45.709,-610.876 44.871,-610.876 44.871,-610.501 45.709,-610.501
  region: 45.703,-611.575 44.865,-611.575 44.865,-611.2 45.703,-611.2
  region net NetC9_2: 69.387,-617.537 69.325,-617.474 69.325,-616.362 69.375,-616.312 70.45,-616.312 70.5,-616.362 70.5,-617.481 70.444,-617.537
  region net NetLED1_2: 67.106,-617.565 67.044,-617.503 67.044,-616.39 67.094,-616.34 68.169,-616.34 68.219,-616.39 68.219,-617.51 68.163,-617.565
  region net GND: 81.707,-628.712 80.869,-628.712 80.869,-628.337 81.707,-628.337
  region net GND: 81.707,-628.062 80.869,-628.062 80.869,-627.688 81.707,-627.687
  region net NetD2_2: 81.707,-630.675 80.869,-630.675 80.869,-630.291 81.707,-630.291
  region net GND: 55.046,-616.133 55.046,-616.971 54.671,-616.971 54.671,-616.133
  region net CS_1: 50.151,-616.133 50.151,-616.971 49.776,-616.971 49.776,-616.133
  region net NetC54_2: 48.046,-616.183 48.046,-617.021 47.671,-617.021 47.671,-616.183
  region net GND: 46.648,-616.183 46.648,-617.021 46.273,-617.021 46.273,-616.183
  region net NetC53_2: 47.346,-616.183 47.346,-617.021 46.971,-617.021 46.971,-616.183
  region net PWDN: 56.738,-608.075 55.9,-608.075 55.9,-607.7 56.738,-607.7
  region net RESET: 56.738,-611.575 55.9,-611.575 55.9,-611.2 56.738,-611.2
  region net START: 56.738,-605.275 55.9,-605.275 55.9,-604.9 56.738,-604.9
  region net SWDIO: 56.738,-605.976 55.9,-605.976 55.9,-605.601 56.738,-605.601
  region net SWD_CLK: 56.738,-606.675 55.9,-606.675 55.9,-606.3 56.738,-606.3
  region net NetM1_32: 56.738,-609.476 55.9,-609.476 55.9,-609.101 56.738,-609.101
  region net NetM1_31: 56.738,-610.175 55.9,-610.175 55.9,-609.8 56.738,-609.8
  region net DRDY: 56.738,-610.876 55.9,-610.876 55.9,-610.501 56.738,-610.501
  region net MISO: 56.738,-613.675 55.9,-613.675 55.9,-613.3 56.738,-613.3
  region net CS: 56.738,-614.376 55.9,-614.376 55.9,-614.001 56.738,-614.001
  region net MOSI: 56.738,-612.976 55.9,-612.976 55.9,-612.601 56.738,-612.601
  region net SCK: 56.738,-612.275 55.9,-612.275 55.9,-611.9 56.738,-611.9
  region net NetC38_2: 45.427,-612.275 44.588,-612.275 44.588,-611.9 45.427,-611.9
  region net NetL4_1: 45.427,-612.976 44.588,-612.976 44.588,-612.601 45.427,-612.601
  region net DVDD: 45.427,-613.675 44.588,-613.675 44.588,-613.3 45.427,-613.3
  region net DVDD: 62.225,-632 62.353,-631.872 62.863,-631.872 62.996,-632.005 62.996,-632.708 63.3,-633.012 63.3,-633.225 62.225,-633.225 62.2,-633.2 61.971,-633.2 61.971,-632.983 62.246,-632.708
  region net DVDD: 61.749,-633.051 61.85,-632.95 63.675,-632.95 63.775,-633.05 63.775,-633.721 63.683,-633.813 61.878,-633.813 61.749,-633.683
  region net NetC11_2: 71.555,-619.459 71.703,-619.311 73.837,-619.311 73.941,-619.415 73.941,-626.334 73.725,-626.55 71.825,-626.55 71.555,-626.28
  region net NetD2_2: 82.946,-630.659 82.946,-630.275 81.533,-630.275 81.532,-630.659
  region net NetD2_2: 73.24,-629.897 73.345,-629.792 80.37,-629.792 80.869,-630.291 81.025,-630.291 81.025,-630.675 80.85,-630.675 79.2,-632.325 73.38,-632.325 73.24,-632.185
  region net NetD2_2: 76.129,-630.353 76.129,-629.931 74.501,-629.931 74.301,-630.131 74.301,-632.181 74.376,-632.256 75.715,-632.256 75.826,-632.144 75.826,-630.655
Bottom Layer:
  region net NetR16_1: 71.164,-610.102 72.002,-610.102 72.002,-610.352 71.164,-610.352
  region net NetL1_1: 71.164,-608.102 71.875,-608.102 71.875,-608.352 71.164,-608.352
  region net VCC: 71.164,-608.602 72.002,-608.602 72.002,-608.852 71.164,-608.852
  region net VCC: 71.164,-609.097 72.002,-609.097 72.002,-609.347 71.164,-609.347
  region net GND: 71.164,-609.602 72.002,-609.602 72.002,-609.852 71.164,-609.852
  region net NetC18_2: 66.881,-610.093 67.719,-610.093 67.719,-610.343 66.881,-610.343
  region net GND: 66.881,-609.589 67.719,-609.589 67.719,-609.839 66.881,-609.839
  region net NetC19_2: 66.881,-609.093 67.719,-609.093 67.719,-609.343 66.881,-609.343
  region net NetL1_2: 66.95,-608.1 67.694,-608.1 67.694,-608.35 66.95,-608.35
  region net DVDD: 66.881,-608.593 67.719,-608.593 67.719,-608.843 66.881,-608.843
  region net NetR9_1: 63.248,-623.581 63.248,-624.419 62.732,-624.419 62.732,-623.581
  region net NetC9_2: 65.15,-623.581 65.15,-624.419 64.634,-624.419 64.634,-623.581
  region net NetR10_2: 63.248,-619.406 63.248,-620.244 62.732,-620.244 62.732,-619.406
  region net GND: 64.2,-619.406 64.2,-620.244 63.684,-620.244 63.684,-619.406
  region net NetC11_2: 65.15,-619.406 65.15,-620.244 64.634,-620.244 64.634,-619.406
  region net NetC43_2: 47.473,-626.081 47.473,-626.919 46.957,-626.919 46.957,-626.081
  region net NetC37_1: 49.375,-626.081 49.375,-626.919 48.859,-626.919 48.859,-626.081
  region net NetC41_2: 49.375,-621.606 49.375,-622.444 48.859,-622.444 48.859,-621.606
  region net NetC41_2: 48.425,-621.606 48.425,-622.444 47.909,-622.444 47.909,-621.606
  region net GND: 47.473,-621.606 47.473,-622.444 46.957,-622.444 46.957,-621.606
  region net NetC48_2: 53.048,-609.132 52.21,-609.132 52.21,-608.446 53.048,-608.446
  region net NetC51_2: 53.063,-611.032 52.225,-611.032 52.225,-610.346 53.063,-610.346
  region net DVDD: 57.563,-611.025 56.725,-611.025 56.725,-610.34 57.563,-610.34
  region net GND: 57.548,-610.083 56.71,-610.083 56.71,-609.398 57.548,-609.398
  region net DVDD: 57.548,-609.125 56.71,-609.125 56.71,-608.44 57.548,-608.44
  region net -2.5V: 35.3,-615.2 35.6,-614.9 35.78,-614.9 36.08,-615.201 36.08,-617.738 35.543,-617.738 35.305,-617.5
  region net DVDD: 35.075,-619.85 35.535,-619.39 38.165,-619.39 38.4,-619.625 38.4,-623.368 38.068,-623.7 35.238,-623.7 35.075,-623.537
  region net -2.5V: 35.1,-614.525 35.375,-614.25 39,-614.25 40.902,-616.152 40.902,-621.077 38.518,-618.693 35.427,-618.693 35.1,-618.366
  region net +2.5V: 35.025,-605.8 36.707,-604.118 40.1,-604.118 40.1,-609.385 38.782,-610.703 38.782,-613.258 38.54,-613.5 35.3,-613.5 35.025,-613.225
  region net NetC11_2: 71.64,-619.383 73.551,-619.376 73.715,-619.54 73.715,-624.262 73.49,-624.487 71.89,-624.487 71.64,-624.237
  region net NetC43_2: 47,-624.875 47.475,-624.875 47.575,-624.975 47.575,-627.118 47.457,-627.236 39.161,-627.236 38.975,-627.05 38.975,-623.075 39.2,-622.85 44.4,-622.85 44.6,-623.05 44.6,-624.619 44.856,-624.875
  region net VCC: 72.3,-603.525 72.475,-603.35 76.8,-603.35 76.975,-603.525 76.975,-605.825 76.832,-605.968 75.282,-605.968 72.975,-608.275 72.3,-608.275
  region net DVDD: 58.696,-610.468 58.721,-610.443 60.021,-610.443 60.021,-618.243 59.696,-618.568 58.437,-618.568 58.087,-618.918 57.921,-618.753 57.921,-614.718 58.696,-613.943
  region net DVDD: 58.196,-623.443 58.231,-623.408 58.231,-614.703 58.196,-614.668 56.62,-614.668 56.596,-614.692 56.596,-621.068 56.846,-621.318 57.231,-621.318 57.521,-621.608 57.521,-623.418 57.546,-623.443
  region net NetC41_2: 47.846,-622.393 48.371,-621.868 48.371,-619.718 48.771,-619.318 52.061,-619.318 52.446,-619.703 52.446,-621.568 52.746,-621.868 54.346,-621.868 54.496,-622.018 54.496,-623.618 54.396,-623.718 47.921,-623.718 47.846,-623.643
  region net -2.5V: 38.9,-621.375 39.15,-621.625 44.4,-621.625 44.675,-621.35 44.675,-614.9 44.425,-614.65 39.15,-614.65 38.9,-614.9
  region net +2.5V: 36.175,-604.868 36.925,-604.118 47.021,-604.118 47.171,-604.268 47.171,-609.535 47.004,-609.703 36.493,-609.703 36.175,-609.385
  region net NetC48_2: 48.279,-604.211 48.46,-604.03 54.061,-604.03 54.296,-604.265 54.296,-609.518 54.112,-609.702 48.506,-609.703 48.279,-609.475
  region net DVDD: 55.471,-610.393 55.522,-610.343 58.721,-610.343 58.721,-608.768 60.021,-608.768 60.021,-610.768 59.735,-611.055 55.508,-611.055 55.471,-611.018
  region net DVDD: 55.471,-608.468 55.521,-608.418 57.457,-608.418 59.525,-606.35 59.525,-609.143 55.521,-609.143 55.471,-609.093
  region net DVDD: 68.396,-608.843 68.396,-608.593 66.889,-608.593 64.652,-606.356 59.525,-606.356 59.525,-608.843
  region net NetL1_1: 71.389,-608.354 71.389,-606.351 71.646,-606.093 71.646,-601.568 70.021,-601.568 70.021,-606.068 70.514,-606.561 70.514,-608.354
  region net NetL1_2: 68.396,-608.354 68.396,-606.618 68.921,-606.093 68.921,-601.568 67.296,-601.568 67.296,-606.093 67.521,-606.318 67.521,-608.354
  region net VCC: 70.521,-608.618 70.546,-608.593 71.96,-608.593 74.25,-606.303 74.25,-608.193 73.118,-609.325 72.765,-609.325 70.538,-609.325 70.521,-609.308
  region net NetD1_1: 68.696,-617.818 68.51,-618.004 67.208,-618.004 66.996,-617.793 66.996,-615.618 67.973,-614.641 75.548,-614.641 76.832,-614.641 76.832,-616.668 76.525,-616.975 68.876,-616.975 68.696,-617.155
  region net NetC11_2: 73.715,-619.54 73.518,-619.343 64.646,-619.343 64.496,-619.493 64.496,-621.504 64.61,-621.618 73.415,-621.618 73.715,-621.318
  region net NetC9_2: 64.421,-622.482 64.56,-622.343 65.416,-622.343 65.546,-622.473 65.546,-624.793 65.759,-625.006 64.209,-625.006 64.421,-624.793
  region net NetC9_2: 71.3,-628.025 73.175,-628.025 73.396,-627.804 73.396,-625.026 73.264,-624.893 64.321,-624.893 64.096,-625.118 64.096,-626.943 64.321,-627.168 70.443,-627.168
  region net NetD2_2: 71.453,-629.784 71.562,-629.675 77.796,-629.675 77.95,-629.829 77.95,-632.144 77.831,-632.262 71.784,-632.262 71.453,-631.932
Multi-Layer:
  pour cut-out: 54.5,-613.739 54.5,-603.675 46.825,-603.675 46.825,-613.739
  pour cut-out: 56.8,-603.929 56.8,-599.44 43.525,-599.44 43.525,-603.929

## Silkscreen, mask and mechanical layers (free items; w line width, h text height)
Top Overlay:
  text "VCC" at 72.8,-603.575 h1 r270
  text "DRDY" at 84.675,-604.225 h0.7
  text "DAT" at 63.175,-605.975 h0.8 r90
  text "GND" at 58.225,-606.1 h0.8 r90
  text "CLK" at 60.8,-606.1 h0.8 r90
  text "DVDD" at 65.95,-606.6 h0.8 r90
  text "MISO" at 84.675,-606.75 h0.7
  text "Switch" at 72.05,-607.25 h1 r90
  text "SCK" at 84.675,-609.3 h0.7
  text "Bluetooth" at 44.509,-611.709 h1 r90
  text "CS" at 84.675,-611.9 h0.7
  text "+2.5V" at 35.237,-612.585 h1.5 r90
  text "START" at 84.194,-614.323 h0.7
  text "VBAT" at 70.001,-615.173 h1
  text "RESET" at 84.194,-617.048 h0.7
  text "-2.5V" at 35.237,-618.013 h1.5 r90
  text "PWDN" at 84.675,-619.525 h0.7
  text "MOSI" at 84.675,-622.025 h0.7
  text "DVDD" at 35.233,-623.35 h1.5 r90
  text "GND" at 35.249,-627.825 h1.5 r90
  text "SD Carrd" at 55.803,-629.625 h1 r90
  text "NEMO_V2-1B_m" at 37.025,-631.625 h1.5
  text "BKIC_ECG" at 38.425,-634.675 h2
Top Solder:
  drawing of 45 lines, arcs and shapes, not listed
Solder Side:
  region: 71.164,-610.102 72.002,-610.102 72.002,-610.352 71.164,-610.352
  region: 71.164,-608.102 71.875,-608.102 71.875,-608.352 71.164,-608.352
  region: 71.164,-608.602 72.002,-608.602 72.002,-608.852 71.164,-608.852
  region: 71.164,-609.116 72.002,-609.116 72.002,-609.366 71.164,-609.366
  region: 71.164,-609.602 72.002,-609.602 72.002,-609.852 71.164,-609.852
  region: 66.881,-610.093 67.719,-610.093 67.719,-610.343 66.881,-610.343
  region: 66.881,-609.607 67.719,-609.607 67.719,-609.857 66.881,-609.857
  region: 66.881,-609.093 67.719,-609.093 67.719,-609.343 66.881,-609.343
  region: 66.856,-608.1 67.694,-608.1 67.694,-608.35 66.856,-608.35
  region: 66.881,-608.593 67.719,-608.593 67.719,-608.843 66.881,-608.843
  region: 63.248,-623.581 63.248,-624.419 62.732,-624.419 62.732,-623.581
  region: 65.15,-623.581 65.15,-624.419 64.634,-624.419 64.634,-623.581
  region: 63.248,-619.406 63.248,-620.244 62.732,-620.244 62.732,-619.406
  region: 64.2,-619.406 64.2,-620.244 63.684,-620.244 63.684,-619.406
  region: 65.15,-619.406 65.15,-620.244 64.634,-620.244 64.634,-619.406
  region: 47.473,-626.081 47.473,-626.919 46.957,-626.919 46.957,-626.081
  region: 49.375,-626.081 49.375,-626.919 48.859,-626.919 48.859,-626.081
  region: 49.375,-621.606 49.375,-622.444 48.859,-622.444 48.859,-621.606
  region: 48.425,-621.606 48.425,-622.444 47.909,-622.444 47.909,-621.606
  region: 47.473,-621.606 47.473,-622.444 46.957,-622.444 46.957,-621.606
  region: 53.048,-609.132 52.21,-609.132 52.21,-608.446 53.048,-608.446
  region: 53.063,-611.032 52.225,-611.032 52.225,-610.346 53.063,-610.346
  region: 57.563,-611.025 56.725,-611.025 56.725,-610.34 57.563,-610.34
  region: 57.548,-610.083 56.71,-610.083 56.71,-609.398 57.548,-609.398
  region: 57.548,-609.125 56.71,-609.125 56.71,-608.44 57.548,-608.44

## Text inside footprints (layer, text, board x,y; h text height)
H1: Top Overlay "B-F" at 81.317,-629.942 h0.9 r90
J7: Mechanical 13 "Card Lock Position" at 61.124,-636.055 h0.41 r180
LED2: Top Overlay "+" at 63.775,-607.5 h0.8
LED3: Top Overlay "+" at 63.775,-609.321 h0.8
M1: Mechanical 2 "No ground pad" at 48.044,-601.88 h0.45; Mechanical 3 "Toplayer no ground pad" at 47.859,-607.765 h0.3
U4: Bottom Overlay "*" at 71.681,-608.065 h1.27; Mechanical 13 "*" at 71.09,-609.132 h1.27